# Altium PCB PCB3.PcbDoc
Units mm, origin at the board's own origin, x right, y up, seen from the top; angles counter-clockwise.
Board outline 125.25 x 74.55 mm, 2 copper layers (Top Layer, Bottom Layer); 25 components, 106 nets, 279 pads, 0 vias.
Unrouted connection lines stored in the file: 154.
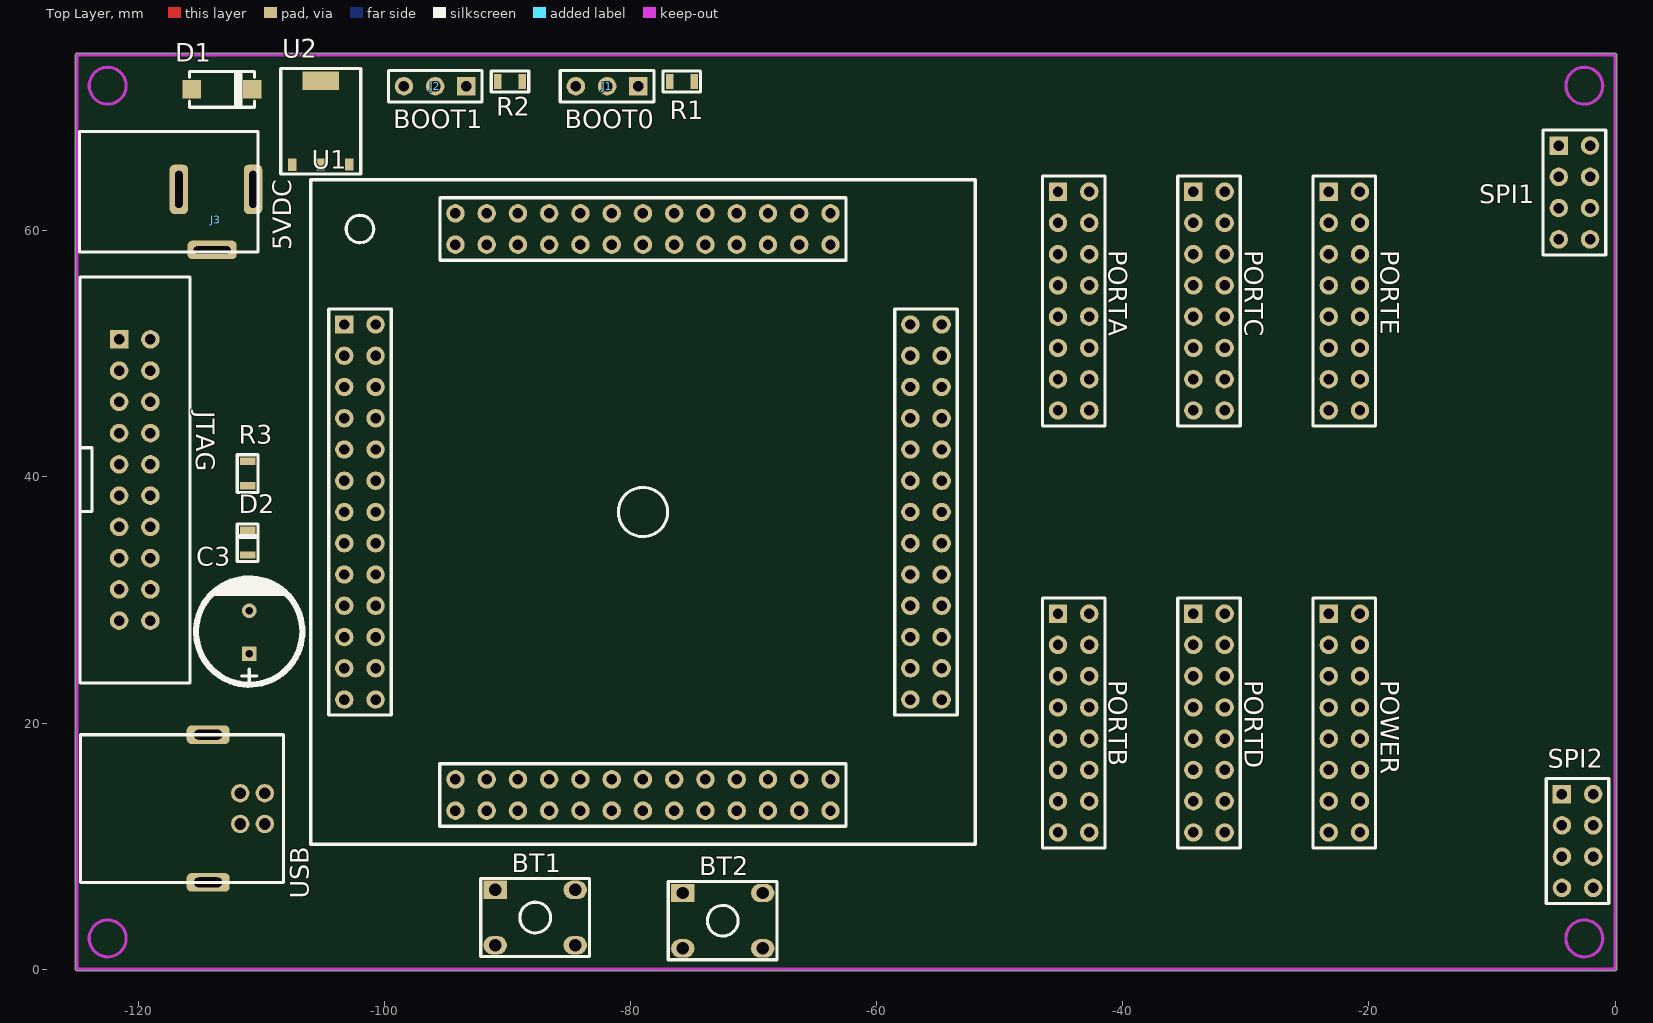
[diagram p0: Top Layer view]
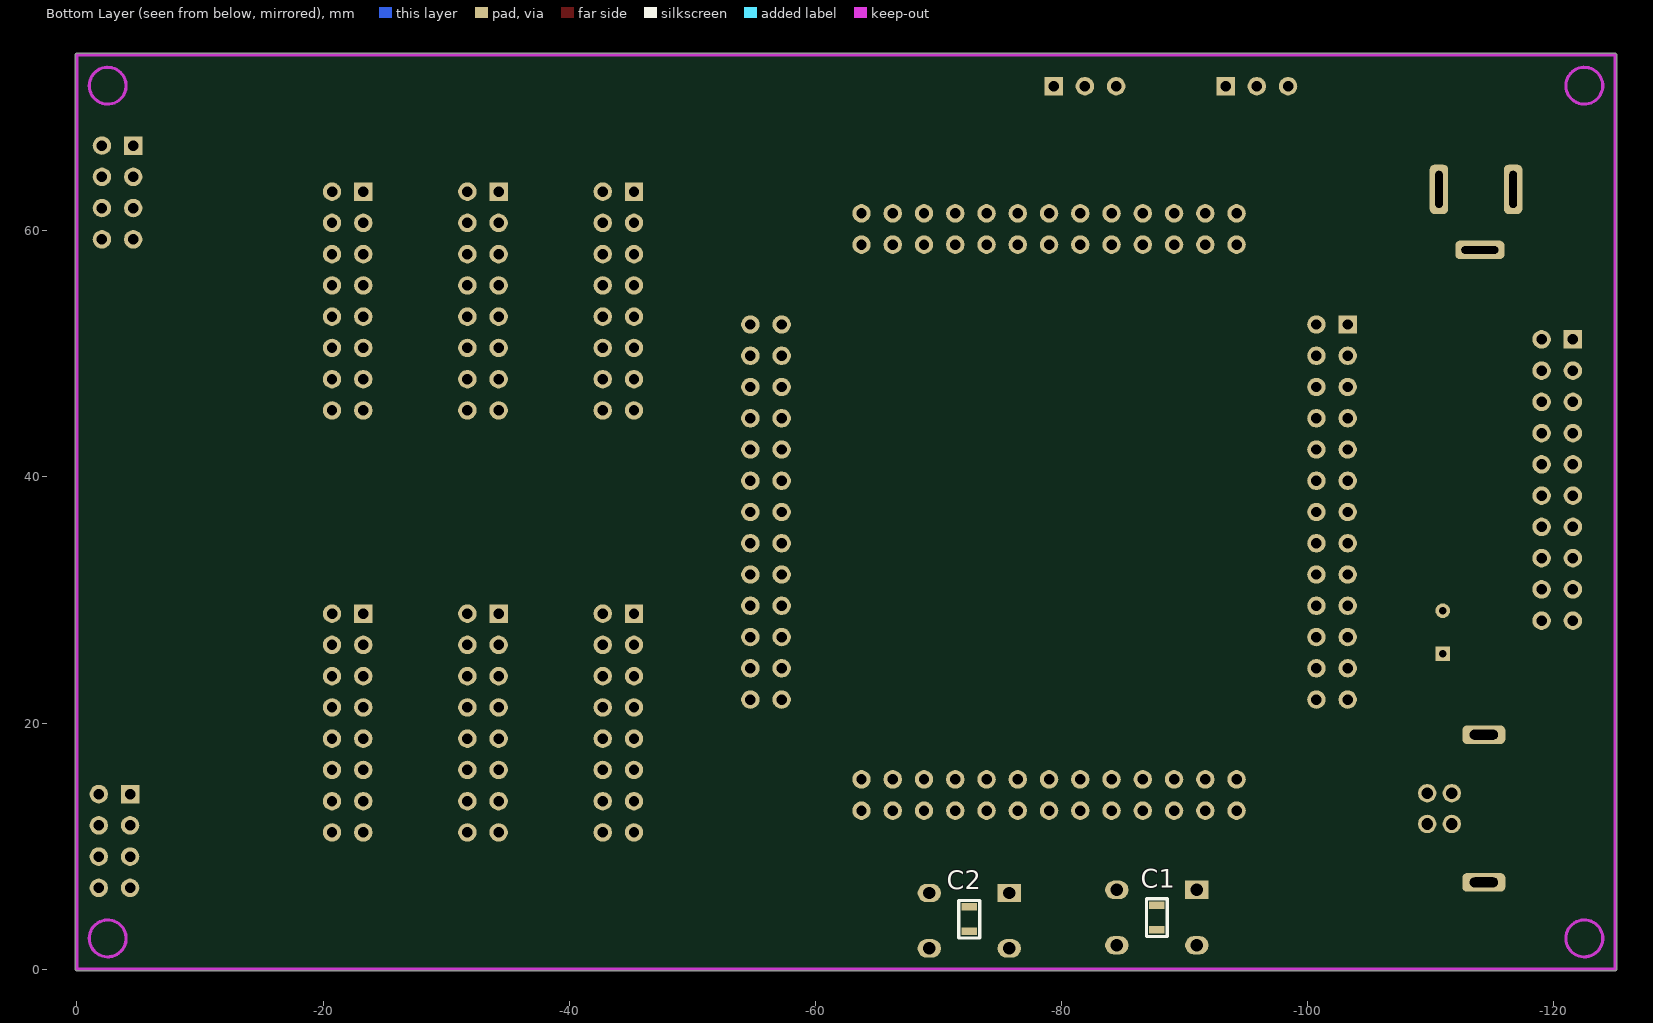
[diagram p1: Bottom Layer view, seen from below]

## Layer stack, top to bottom
Top Solder: solder mask 0.0102, Solder Resist, Dk 3.5
Top Layer: signal copper 0.0356
Dielectric 1: dielectric 0.32, FR-4, Dk 4.8
Bottom Layer: signal copper 0.0356
Bottom Solder: solder mask 0.0102, Solder Resist, Dk 3.5

## Board outline
-125.127,0 ccw(c-125,0) -125,-0.127 0,-0.127 ccw(c0,0) 0.127,0 0.127,74.295 ccw(c0,74.295) -0.016,74.421 ccw(c-0.032,74.295) -0.032,74.422 -125,74.422 ccw(c-125,74.295) -125.127,74.295

## Design rules (kind name [scope] priority, off if disabled: settings)
Clearance [All] p1: gap=0.254 ignorepadtopadclearanceinfootprint=FALSE except(0: Arc-Hole Track-Hole SMDPad-Hole THPad-Hole Via-Hole Fill-Hole Poly-Hole Region-Hole Text-Hole)
PolygonConnect [All] p1: connectstyle=Relief reliefconductorwidth=0.254 reliefentries=4 polygonreliefangle="90 Angle" airgapwidth=0.254
RoutingVias [All] p1: holewidth=0.711 width=1.27 viastyle="Through Hole" minholewidth=0.711 minwidth=1.27 maxholewidth=0.711 maxwidth=1.27
SolderMaskExpansion [All] p1: expansion=0.102
Width [All] p1: maxlimit=0.254 minlimit=0.254 preferedwidth=0.254
30 further rules are at their usual default settings.

## Components (designator, comment, footprint, x,y, rotation, side; value= is the part's Value field where it differs from the comment)
BT1 "Button Hole" BUTTON_HOLE_5.0mm -87.757,4.191 r90 top
BT2 "Button Hole" BUTTON_HOLE_5.0mm -72.517,3.937 r90 top
C1 "103" C0805 -87.757,4.191 r270 bottom
C2 "103" C0805 -72.517,4.064 r270 bottom
C3 "100uF" CAP_RAD_7mm -110.998,27.432 r90 top
D1 "1N4007" DO-214AC(SMA) -111.252,71.501 r180 top
D2 "LED0805" L0805RED -110.5,34.655 r90 top
J1 "BOOT0" "Header 3x1 TH Pitch 2.54mm" -81.915,71.755 r180 top
J2 "BOOT1" "Header 3x1 TH Pitch 2.54mm" -95.885,71.755 r180 top
J3 "5VDC" DC_K375A_Power -117.988,50.373 r270 top
JTAG "ARM-JTAG" IDC_CONNECTOR_20_2.54 -120.301,39.751 r0 top
PORTA "Header 8x2 TH Pitch 2.54mm" "Header 8x2 TH Pitch 2.54mm" -44,54.295 r0 top
PORTB "Header 8x2 TH Pitch 2.54mm" "Header 8x2 TH Pitch 2.54mm" -44,20 r0 top
PORTC "Header 8x2 TH Pitch 2.54mm" "Header 8x2 TH Pitch 2.54mm" -33,54.295 r0 top
PORTD "Header 8x2 TH Pitch 2.54mm" "Header 8x2 TH Pitch 2.54mm" -33,20 r0 top
PORTE "Header 8x2 TH Pitch 2.54mm" "Header 8x2 TH Pitch 2.54mm" -22,54.295 r0 top
POWER "Header 8x2 TH Pitch 2.54mm" "Header 8x2 TH Pitch 2.54mm" -22,20 r0 top
R1 "4k7" R0805 -74.835,72.136 r0 top
R2 "4k7" R0805 -88.805,72.136 r0 top
R3 "330" R0805 -111.125,39.275 r270 top
SPI1 "Header 4x2 TH Pitch 2.54mm" "Header 4x2 TH Pitch 2.54mm" -3.302,63.119 r0 top
SPI2 "Header 4x2 TH Pitch 2.54mm" "Header 4x2 TH Pitch 2.54mm" -3.048,10.414 r0 top
U1 "SOCKET-ADAPTER-OTQ-100-05-12" SOCKET-ADAPTER-OTQ-100-05-12 -79,37.15 r90 top
U2 "AMS1117" SOT223-3 -105.188,68.834 r0 top
USB "USB B Type" USB-B-TYPE -110.732,13.05 r0 top

## Footprints (in the part's own frame and the unit in brackets; to place one, negate y for a bottom-side part, rotate by r counter-clockwise, add the part's x,y. Pads: shape width x height; smd on the part's side, far side on the other; paste and mask are expansions set on the pad)
BUTTON_HOLE_5.0mm [mm]
  rect 1.5x1.9 hole 1: 1(2.25,3.25)
  oval 1.5x1.9 hole 1: 2(2.25,-3.25) 3(-2.25,3.25) 4(-2.25,-3.25)
  silkscreen extent -3.18,-4.4 3.18,4.43, body extent -3,-3.86 3,3.86, height 5
C0805 [mm]
  rect 0.6x1.24 smd: 1(-1,0) 2(1,0)
  silkscreen extent -1.52,-0.85 1.53,0.85, body extent -1,-0.6 1,0.6, height 1
CAP_RAD_7mm [mm]
  rect 1.2x1.2 hole 0.6: 1(-1.805,0)
  round 1.2 hole 0.6: 2(1.695,0)
  silkscreen extent -4.32,-4.32 4.32,4.31, body extent -4.06,-4 3.94,4, height 11.33
DC_K375A_Power [mm]
  rrect50% 4x1.5 hole 0.6 slot 3 at 0 deg: 1(-13,7.3) 2(-13,1.275)
  rrect50% 1.5x4 hole 0.6 slot 3 at 90 deg: 3(-8.075,3.975)
  silkscreen extent -17.7,-6.8 -7.9,7.7, body extent -17.7,-6.8 -7.9,7.7, height 11
DO-214AC(SMA) [mm]
  rect 1.5x1.5 smd: 1(4.43,0) 2(-0.5,0)
  silkscreen extent -0.67,-1.5 4.61,1.5, body extent -0.67,-1.46 4.61,1.46, height 2.41
"Header 3x1 TH Pitch 2.54mm" [mm]
  rect 1.5x1.5 hole 0.85: 1(-2.54,0)
  round 1.5 hole 0.85: 2(0,0) 3(2.54,0)
  silkscreen extent -3.81,-1.27 3.81,1.27, body extent -3.81,-1.27 3.81,1.27, height 8.89
"Header 4x2 TH Pitch 2.54mm" [mm]
  rect 1.5x1.5 hole 0.85: 1(-1.27,3.81)
  round 1.5 hole 0.85: 2(1.27,3.81) 3(-1.27,1.27) 4(1.27,1.27) 5(-1.27,-1.27) 6(1.27,-1.27) 7(-1.27,-3.81) 8(1.27,-3.81)
  silkscreen extent -2.54,-5.08 2.54,5.08, body extent -2.54,-5.08 2.54,5.08, height 8.89
"Header 8x2 TH Pitch 2.54mm" [mm]
  rect 1.5x1.5 hole 0.85: 1(-1.27,8.89)
  round 1.5 hole 0.85: 2(1.27,8.89) 3(-1.27,6.35) 4(1.27,6.35) 5(-1.27,3.81) 6(1.27,3.81) 7(-1.27,1.27) 8(1.27,1.27) 9(-1.27,-1.27) 10(1.27,-1.27) 11(-1.27,-3.81) 12(1.27,-3.81) 13(-1.27,-6.35) 14(1.27,-6.35) 15(-1.27,-8.89) 16(1.27,-8.89)
  silkscreen extent -2.54,-10.16 2.54,10.16, body extent -2.54,-10.16 2.54,10.16, height 8.89
IDC_CONNECTOR_20_2.54 [mm]
  rect 1.5x1.5 hole 0.85: 1(-1.27,11.43)
  round 1.5 hole 0.85: 2(1.27,11.43) 3(-1.27,8.89) 4(1.27,8.89) 5(-1.27,6.35) 6(1.27,6.35) 7(-1.27,3.81) 8(1.27,3.81) 9(-1.27,1.27) 10(1.27,1.27) 11(-1.27,-1.27) 12(1.27,-1.27) 13(-1.27,-3.81) 14(1.27,-3.81) 15(-1.27,-6.35) 16(1.27,-6.35) 17(-1.27,-8.89) 18(1.27,-8.89) 19(-1.27,-11.43) 20(1.27,-11.43)
  silkscreen extent -4.45,-16.5 4.5,16.5, body extent -4.47,-16.6 4.42,16.6, height 9
L0805RED [mm]
  rect 0.6x1.24 smd: 1(-1,0.625) 2(1,0.625)
  silkscreen extent -1.53,-0.23 1.52,1.47, body extent -1,0 1,1.25, height 1.1
R0805 [mm]
  rect 0.6x1.24 smd: 1(-2,0) 2(0,0)
  silkscreen extent -2.52,-0.85 0.53,0.85, body extent -2,-0.62 0,0.62, height 0.45
SOCKET-ADAPTER-OTQ-100-05-12 [mm]
  rect 1.5x1.5 hole 0.85: 1(15.24,24.27)
  round 1.5 hole 0.85: 2(15.24,21.73) 3(12.7,24.27) 4(12.7,21.73) 5(10.16,24.27) 6(10.16,21.73) 7(7.62,24.27) 8(7.62,21.73) 9(5.08,24.27) 10(5.08,21.73) 11(2.54,24.27) 12(2.54,21.73) 13(0,24.27) 14(0,21.73) 15(-2.54,24.27) 16(-2.54,21.73) 17(-5.08,24.27) 18(-5.08,21.73) 19(-7.62,24.27) 20(-7.62,21.73) 21(-10.16,24.27) 22(-10.16,21.73) 23(-12.7,24.27) 24(-12.7,21.73) 25(-15.24,24.27) 26(-21.73,15.24) 27(-24.27,12.7) 28(-21.73,12.7) 29(-24.27,10.16) 30(-21.73,10.16) 31(-24.27,7.62) 32(-21.73,7.62) 33(-24.27,5.08) 34(-21.73,5.08) 35(-24.27,2.54) 36(-21.73,2.54) 37(-24.27,0) 38(-21.73,0) 39(-24.27,-2.54) 40(-21.73,-2.54) 41(-24.27,-5.08) 42(-21.73,-5.08) 43(-24.27,-7.62) 44(-21.73,-7.62) 45(-24.27,-10.16) 46(-21.73,-10.16) 47(-24.27,-12.7) 48(-21.73,-12.7) 49(-24.27,-15.24) 50(-21.73,-15.24) 51(-15.24,-24.27) 52(-15.24,-21.73) 53(-12.7,-24.27) 54(-12.7,-21.73) 55(-10.16,-24.27) 56(-10.16,-21.73) 57(-7.62,-24.27) 58(-7.62,-21.73) 59(-5.08,-24.27) 60(-5.08,-21.73) 61(-2.54,-24.27) 62(-2.54,-21.73) 63(0,-24.27) 64(0,-21.73) 65(2.54,-24.27) 66(2.54,-21.73) 67(5.08,-24.27) 68(5.08,-21.73) 69(7.62,-24.27) 70(7.62,-21.73) 71(10.16,-24.27) 72(10.16,-21.73) 73(12.7,-24.27) 74(12.7,-21.73) 75(15.24,-24.27) 76(21.73,-15.24) 77(24.27,-12.7) 78(21.73,-12.7) 79(24.27,-10.16) 80(21.73,-10.16) 81(24.27,-7.62) 82(21.73,-7.62) 83(24.27,-5.08) 84(21.73,-5.08) 85(24.27,-2.54) 86(21.73,-2.54) 87(24.27,0) 88(21.73,0) 89(24.27,2.54) 90(21.73,2.54) 91(24.27,5.08) 92(21.73,5.08) 93(24.27,7.62) 94(21.73,7.62) 95(24.27,10.16) 96(21.73,10.16) 97(24.27,12.7) 98(21.73,12.7) 99(24.27,15.24) 100(21.73,15.24) 101(-15.24,21.73) 102(-24.27,15.24) 103(15.24,-21.73) 104(24.27,-15.24)
  silkscreen extent -27,-27 27,27, body extent -25.54,-25.54 25.54,25.54, height 8.89
SOT223-3 [mm]
  rect 0.7x1 smd: 1(-2.3,-3.475) 2(0,-3.45) 3(2.325,-3.45)
  rect 3x1.5 smd: 4(0,3.375)
  silkscreen extent -3.25,-4.2 3.25,4.35, body extent -3.25,-3.5 3.25,3.5, height 1.7
USB-B-TYPE [mm]
  round 1.5 hole 0.95: 1(1,-1.25) 2(1,1.25) 3(-1,1.25) 4(-1,-1.25)
  rrect50% 3.5x1.5 hole 0.8 slot 2.3 at 0 deg: S1(-3.6,6) S2(-3.6,-6)
  silkscreen extent -13.98,-6 2.52,6, body extent -13.97,-7.42 2.53,7.37, height 11

## Part data
C1 C2: library part C0805
C3: library part Capacitor(Radian)
D1: library part "Diode 1N4007-DO214AC(SMA)"
J1 J2: library part "Header 3x1 TH Pitch 2.54mm"
J3: library part JackDC
JTAG: library part IDC_2.54_10x2
R1 R2 R3: library part "Resistor SMD"
U2: library part AMS1117(SOT-223)

## Nets (pads, with @x,y where several pads share a name; then routed paths per layer and width w, separated by ;. In a path a pad name is that pad's centre, name@x,y a point inside that pad or via, vN(x,y) a via of type N, cw(c..) or ccw(c..) an arc to the next point about the centre after c; other vN are vias at no path point)
BOOT0: R1.2 U1.94
BOOT1: R2.2
GND: BT1.3 BT2.3 C1.2 C2.2 C3.2 J1.3 J2.3 J3.2 JTAG.4 JTAG.6 JTAG.8 JTAG.10 JTAG.12 JTAG.14 JTAG.16 JTAG.18 JTAG.20 POWER.1 POWER.3 POWER.5 POWER.7 POWER.9 POWER.11 POWER.13 POWER.15 R3.1 SPI1.1 SPI2.1 U2.1
JNRST: JTAG.3 PORTB.5 U1.90
JTCK: JTAG.9 PORTA.15 U1.76
JTDI: JTAG.5 PORTA.16 U1.77
JTDO: JTAG.13 PORTB.4 U1.89
JTMS: JTAG.7 PORTA.14 U1.72
NC: U1.73
NetD1_1: D1.1 J3.1
NetD1_2: D1.2 U2.3
NetD2_2: D2.2 R3.2
NetJ1_2: J1.2 R1.1
NetJ2_2: J2.2 R2.1
NRST: JTAG.15 U1.14
PA0: PORTA.1 U1.23
PA1: PORTA.2 U1.24
PA2: PORTA.3 U1.25
PA3: PORTA.4 U1.26
PA4: PORTA.5 U1.29
PA5: PORTA.6 U1.30
PA6: PORTA.7 U1.31
PA7: PORTA.8 U1.32
PA8: PORTA.9 U1.67
PA9: PORTA.10 U1.68
PA10: PORTA.11 U1.69
PA11: PORTA.12 U1.70
PA12: PORTA.13 U1.71
PB0: PORTB.1 SPI2.3 U1.35
PB1: PORTB.2 SPI2.4 U1.36
PB2: PORTB.3 SPI2.8 U1.37
PB5: PORTB.6 U1.91
PB6: PORTB.7 U1.92
PB7: PORTB.8 U1.93
PB8: PORTB.9 U1.95
PB9: PORTB.10 U1.96
PB10: BT2.1 C2.1 PORTB.11 U1.47
PB11: BT1.1 C1.1 PORTB.12 U1.48
PB12: PORTB.13 U1.51
PB13: PORTB.14 U1.52
PB14: PORTB.15 U1.53
PB15: PORTB.16 U1.54
PC0: PORTC.1 SPI1.3 U1.15
PC1: PORTC.2 SPI1.4 U1.16
PC2: PORTC.3 SPI1.8 U1.17
PC3: PORTC.4 U1.18
PC4: PORTC.5 U1.33
PC5: PORTC.6 U1.34
PC6: PORTC.7 U1.63
PC7: PORTC.8 U1.64
PC8: PORTC.9 U1.65
PC9: PORTC.10 U1.66
PC10: PORTC.11 U1.78
PC11: PORTC.12 U1.79
PC12: PORTC.13 U1.80
PC13: PORTC.14 U1.7
PC14: PORTC.15 U1.8
PC15: PORTC.16 U1.9
PD0: PORTD.1 U1.81
PD1: PORTD.2 U1.82
PD2: PORTD.3 U1.83
PD3: PORTD.4 U1.84
PD4: PORTD.5 U1.85
PD5: PORTD.6 U1.86
PD6: PORTD.7 U1.87
PD7: PORTD.8 U1.88
PD8: PORTD.9 U1.55
PD9: PORTD.10 U1.56
PD10: PORTD.11 U1.57
PD11: PORTD.12 U1.58
PD12: PORTD.13 U1.59
PD13: PORTD.14 U1.60
PD14: PORTD.15 U1.61
PD15: PORTD.16 U1.62
PE0: PORTE.1 U1.97
PE1: PORTE.2 U1.98
PE2: PORTE.3 U1.1
PE3: PORTE.4 U1.2
PE4: PORTE.5 U1.3
PE5: PORTE.6 U1.4
PE6: PORTE.7 U1.5
PE7: PORTE.8 U1.38
PE8: PORTE.9 U1.39
PE9: PORTE.10 U1.40
PE10: PORTE.11 U1.41
PE11: PORTE.12 U1.42
PE12: PORTE.13 U1.43
PE13: PORTE.14 U1.44
PE14: PORTE.15 U1.45
PE15: PORTE.16 U1.46
PIN6: U1.6
PIN10: U1.10 U1.27 U1.49 U1.74 U1.99
PIN11: U1.11 U1.28 U1.50 U1.75 U1.100
PIN12: U1.12
PIN13: U1.13
PIN19: U1.19
PIN20: U1.20
PIN21: U1.21
PIN22: U1.22
SPI1-MISO: SPI2.7
SPI1-MOSI: SPI2.6
SPI1-SCK: SPI2.5
SPI2-MISO: SPI1.7
SPI2-MOSI: SPI1.6
SPI2-SCK: SPI1.5
VCC: C3.1 D2.1 J1.1 J2.1 JTAG.1 JTAG.2 POWER.2 POWER.4 POWER.6 POWER.8 POWER.10 POWER.12 POWER.14 POWER.16 SPI1.2 SPI2.2 U2.2
pads on no net: BT1.2 BT1.4 BT2.2 BT2.4 J3.3 JTAG.11 JTAG.17 JTAG.19 U1.101 U1.102 U1.103 U1.104 U2.4 USB.1 USB.2 USB.3 USB.4 USB.S1 USB.S2

## Keep-outs
Keep-Out Layer:
  circle w0.254: c-2.5,71.795 r1.5
  circle w0.254: c-2.5,2.5 r1.5
  circle w0.254: c-122.5,2.5 r1.5
  circle w0.254: c-122.5,71.795 r1.5
  lines w0.254: -0.032,74.295 -125,74.295 -125,0 0,0 0,74.295

## Dimensions
-125,74.295 to -125,0 on Drill Drawing